# Altium PCB PCB1.PcbDoc
Units mil, origin at the board's own origin, x right, y up, seen from the top; angles counter-clockwise.
Board outline 3346.46 x 2204.72 mil, 2 copper layers (Top Layer, Bottom Layer); 25 components, 15 nets, 68 pads, 0 vias.
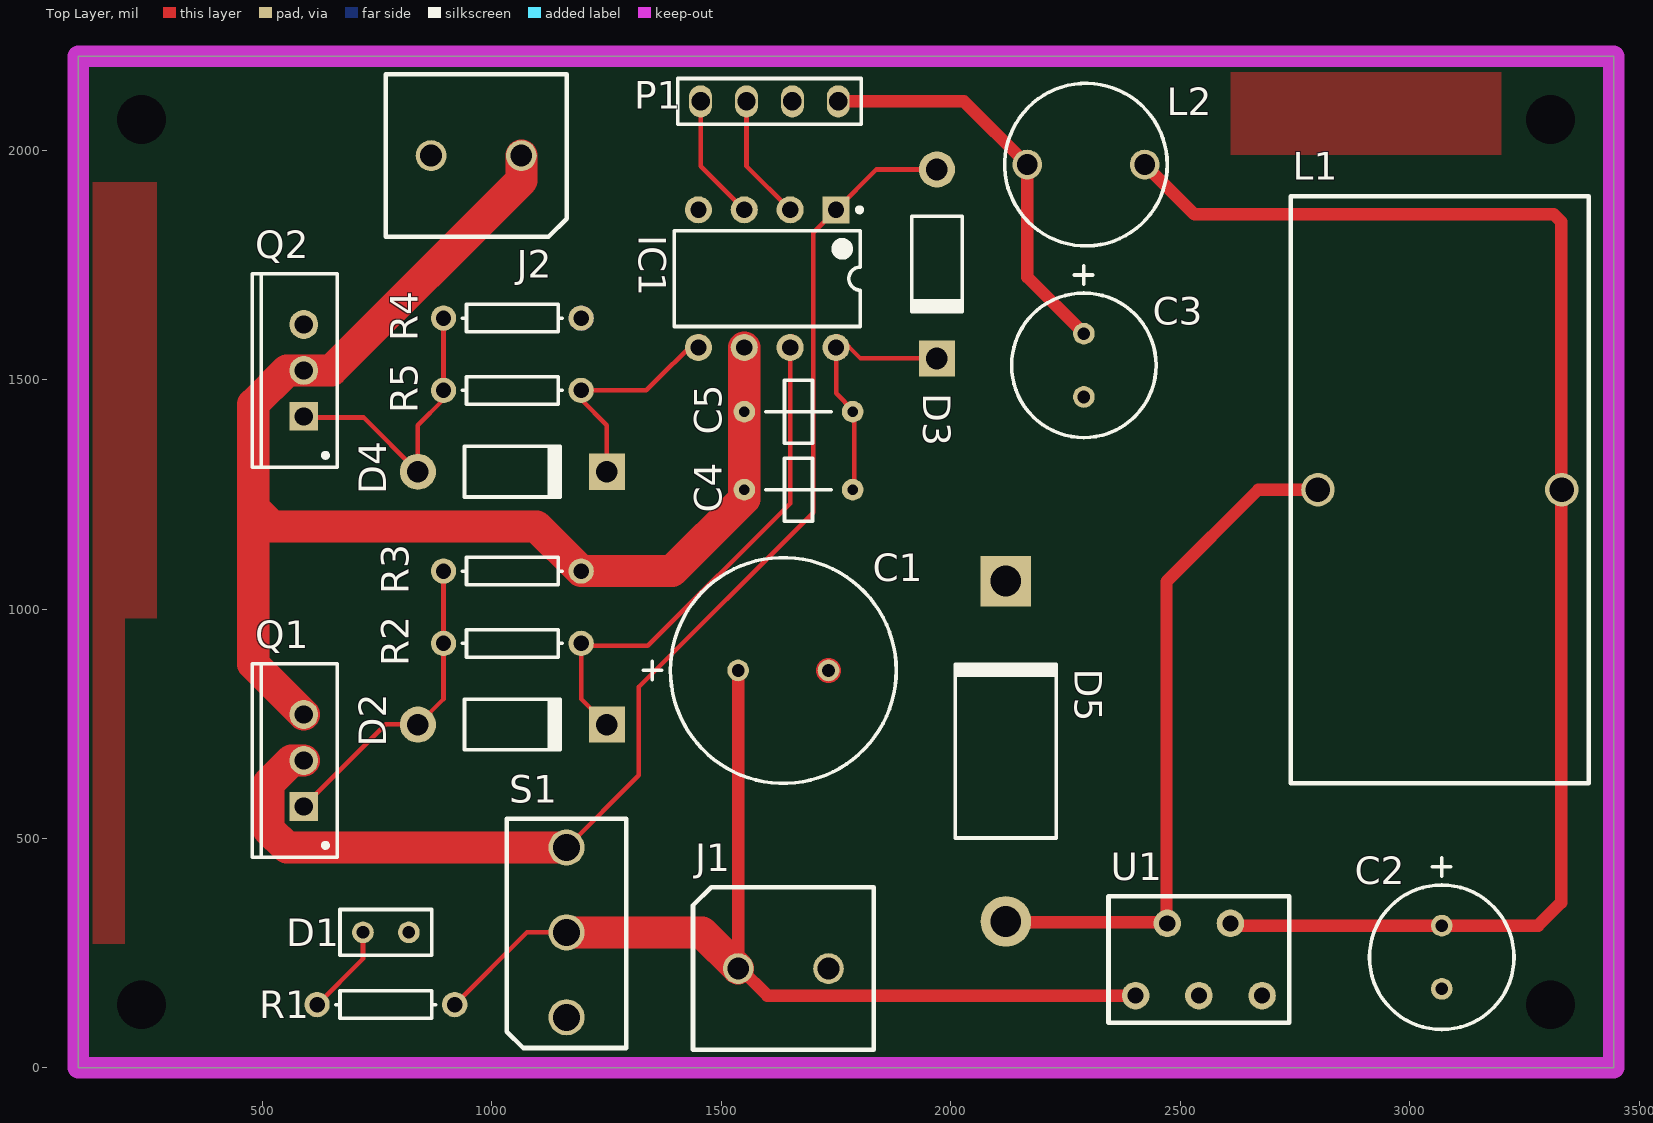
[diagram p0: Top Layer view]
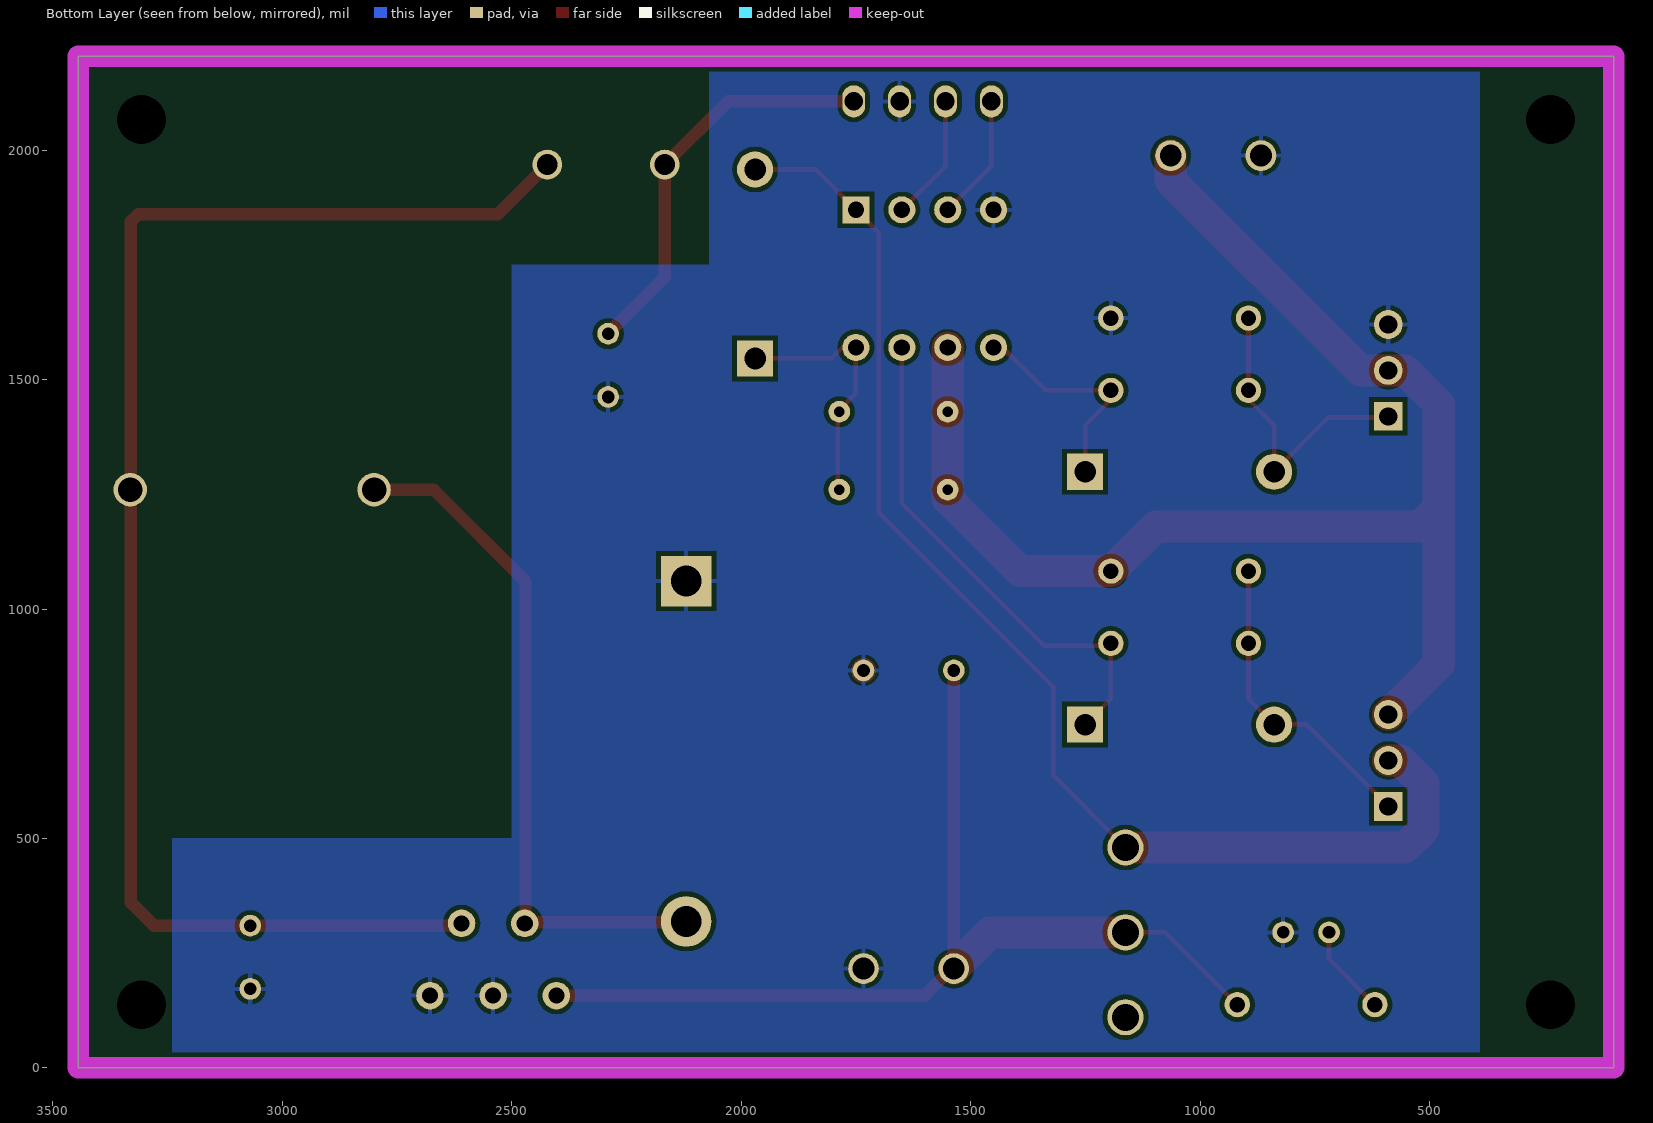
[diagram p1: Bottom Layer view, seen from below]

## Layer stack, top to bottom
Top Solder: solder mask 0.4, Solder Resist, Dk 3.5
Top Layer: signal copper 1.4
Dielectric 1: dielectric 12.6, FR-4, Dk 4.8
Bottom Layer: signal copper 1.4
Bottom Solder: solder mask 0.4, Solder Resist, Dk 3.5

## Board outline
98.43,0 3444.88,0 3444.88,2204.72 98.43,2204.72

## Design rules (kind name [scope] priority, off if disabled: settings)
Clearance [All] p1: gap=10 ignorepadtopadclearanceinfootprint=TRUE except(0: Arc-Hole Track-Hole SMDPad-Hole THPad-Hole Via-Hole Fill-Hole Poly-Hole Region-Hole Text-Hole)
PolygonConnect [All] p1: connectstyle=Relief reliefconductorwidth=10 reliefentries=4 polygonreliefangle="90 Angle" airgapwidth=10
RoutingVias [All] p1: holewidth=28 width=50 viastyle="Through Hole" minholewidth=28 minwidth=50 maxholewidth=28 maxwidth=50
SolderMaskExpansion [All] p1: expansion=4 istentingtop=FALSE
Width [All] p1: maxlimit=100 minlimit=10 preferedwidth=10
30 further rules are at their usual default settings.

## Components (designator, comment, footprint, x,y, rotation, side; value= is the part's Value field where it differs from the comment)
C1 "Cap Pol1" EEU-FM1V681 1733.54,866.14 r180 top value=680uF
C2 "Cap Pol1" EEU-FM1V221L 3070,172.2 r90 top value=220uF
C3 "Cap Pol1" EEU-FR1V181 2290,1462.2 r90 top value=180uF
C4 "Cap" "Axial Cap 0.5mm" 1550,1260 r0 top value=22uF
C5 "Cap" "Axial Cap 0.5mm" 1550,1430 r0 top value=100nF
D1 "LED" RAD-0.1 768.98,295.28 r0 top
D2 "1N4004" DO-41 1044.57,748.03 r0 top
D3 "1N4004" DO-41 1969.76,1751.97 r270 top
D4 "1N4004" DO-41 1044.57,1299.21 r0 top
D5 "1N5824" DO-201AD 2120,690 r90 top
IC1 "IR2301" DIP-8 1600,1720 r270 top
J1 "Screw Terminal" ST-2 1536.69,216.54 r0 top
J2 "Screw Terminal" ST-2 1064.25,1988.19 r180 top
L1 "Inductor" "Inductor 2307-V-RC" 2800,1260 r0 top value=33uH
L2 "Inductor" "Inductor Dia: 8.8mm" 2422.52,1968.5 r180 top value=3uH
P1 "4-Pin Header" HDR-4P 1754.8,2106.3 r180 top
Q1 "IRF520" TO-220AB 590,670 r90 top
Q2 "IRF520" TO-220AB 590,1520 r90 top
R1 "Resistor" AXIAL-0.3 768.98,137.8 r0 top
R2 "Res1" AXIAL-0.3 1044.57,925.2 r180 top value=10
R3 "Res1" AXIAL-0.3 1044.57,1082.68 r180 top value=1K
R4 "Res1" AXIAL-0.3 1044.57,1633.86 r180 top value=1K
R5 "Res1" AXIAL-0.3 1044.57,1476.38 r180 top value=10
S1 "Switch" "E101 Switch" 1292.6,43.31 r90 top
U1 "Step-down switching regulator" TO-220-5 2402.83,157.48 r0 top

## Footprints (in the part's own frame and the unit in brackets; to place one, negate y for a bottom-side part, rotate by r counter-clockwise, add the part's x,y. Pads: shape width x height; smd on the part's side, far side on the other; paste and mask are expansions set on the pad)
"Axial Cap 0.5mm" [mm]
  round 1.2 hole 0.6: 1(0,0) 2(6,0)
  silkscreen extent 1.2,-1.75 4.8,1.75
AXIAL-0.3 [mm] "Axial Device, Thru-Hole; 2 Leads; 0.3 in Pin Spacing"
  round 1.4 hole 0.85: 1(-3.81,0) 2(3.81,0)
  silkscreen extent -2.77,-0.76 2.77,0.76
DIP-8 [mm] "DIP; 8 Leads; Row Spacing 7.62 mm; Pitch 2.54 mm"
  rect 1.5x1.5 hole 0.9: 1(-3.81,3.81)
  round 1.5 hole 0.9: 2(-3.81,1.27) 3(-3.81,-1.27) 4(-3.81,-3.81) 5(3.81,-3.81) 6(3.81,-1.27) 7(3.81,1.27) 8(3.81,3.81)
  silkscreen extent -3.93,-5.15 2.65,5.24, body extent -3.6,-5.15 3.6,5.15, height 5.08
DO-41 [mm] "Diode, Axial; Body 5.2 x 2.7 mm (LxDia. max), Lead Dia. 0.86 mm (max)"
  round 2 hole 1.2: 1(-5.23,0)
  rect 2x2 hole 1.2: 2(5.23,0)
  silkscreen extent -2.65,-1.4 2.75,1.4
DO-201AD [mm] "Diode, Axial; Body 9.5 x 5.6 mm (LxDia. max), Lead Dia. 1.32 mm (max)"
  round 2.8 hole 1.7: 1(-9.42,0)
  rect 2.8x2.8 hole 1.7: 2(9.42,0)
  silkscreen extent -4.8,-2.8 4.9,2.8
"E101 Switch" [mm]
  round 2 hole 1.5: 1(1.7,3.3) 2(6.4,3.3) 3(11.1,3.3)
  silkscreen extent 0,0 12.7,6.6
EEU-FM1V221L [mm]
  round 1.2 hole 0.7: 1(3.5,0) 2(0,0)
  silkscreen extent -2.25,-4 7.26,4
EEU-FM1V681 [mm]
  round 1.2 hole 0.7: 1(5,0) 2(0,0)
  silkscreen extent -3.75,-6.25 10.25,6.25
EEU-FR1V181 [mm]
  round 1.2 hole 0.7: 1(3.5,0) 2(0,0)
  silkscreen extent -2.25,-4 7.26,4
HDR-4P [mil]
  oval 50x70 hole 40: 1(0,0) 2(100,0) 3(200,0) 4(300,0)
  silkscreen extent -50,-50 350,50
"Inductor 2307-V-RC" [mm]
  round 1.85 hole 1.35: 1(0,0) 2(13.5,0)
  silkscreen extent -1.5,-16.25 15,16.25
"Inductor Dia: 8.8mm" [mm]
  round 1.65 hole 1.15: 1(0,0) 2(6.5,0)
  silkscreen extent -1.25,-4.5 7.75,4.5
RAD-0.1 [mm] "Radial Cap, Thru-Hole; 2 Leads; 0.1 in Pin Spacing"
  round 1.2 hole 0.7: 1(-1.27,0) 2(1.27,0)
  silkscreen extent -2.54,-1.27 2.54,1.27
ST-2 [mm] "2 Port Screw Terminal"
  round 1.7 hole 1.2: 1(0,0) 2(5,0)
  silkscreen extent -2.5,-4.5 7.5,4.5
TO-220-5 [mm] "TO-220-5"
  round 1.524 hole 0.89: 1(0,0) 2(1.75,4) 3(3.5,0) 4(5.25,4) 5(7,0)
  silkscreen extent -1.5,-1.5 8.5,5.5
TO-220AB [mm] "TO, Thru-Hole, Vertical, Heatsink Mounted; 3 In-Line Leads; Pitch 2.54 mm"
  rect 1.6x1.6 hole 1: 1(-2.54,0)
  round 1.6 hole 1: 2(0,0) 3(2.54,0)
  silkscreen extent -5.35,-1.85 5.35,2.85, body extent -5.4,-1.9 5.4,2.9, height 19.3

## Part data
C1 C2 C3: "Polarized Capacitor (Radial)", LatestRevisionDate=17-Jul-2002, LatestRevisionNote="Re-released for DXP Platform.", PackageDescription="Polarized Capacitor (Radial); 2 Leads", PackageReference=RB7.6-15, Published=8-Jun-2000, Publisher="Altium Limited"
C4 C5: "Capacitor", LatestRevisionDate=17-Jul-2002, LatestRevisionNote="Re-released for DXP Platform.", PackageDescription="Radial Cap, Thru-Hole; 2 Leads; 0.3 in Pin Spacing", PackageReference=RAD-0.3, Published=8-Jun-2000, Publisher="Altium Limited"
D1: "Generic LED", Color=Red
D2 D3 D4: library part "Diode 1N4004", "1 Amp General Purpose Rectifier", Code_JEDEC=DO-204-AL, ComponentLink1Description="Manufacturer Link", ComponentLink1URL=http://www.fairchildsemi.com/, ComponentLink2Description=Datasheet, ComponentLink2URL=http://www.fairchildsemi.com/ds/1N%2F1N4001.pdf, DatasheetVersion=1998, LatestRevisionDate=17-Jul-2002, LatestRevisionNote="Re-released for DXP Platform.", PackageDescription="Diode, Axial; Body 5.2 x 2.7 mm (LxDia. max), Lead Dia. 0.86 mm (max)", PackageReference=DO-41, PackageVersion=Aug-1999, Published=8-Jun-2000, Publisher="Altium Limited"
D5: library part "Schottky Diode"
IC1: "High and Low Side Driver"
J1 J2: "2 Port Screw Terminal"
P1: library part HDR_1x4
Q1 Q2: library part NMOS-2, "N-Channel Power MOSFET", ComponentLink1Description="Manufacturer Link", ComponentLink1URL=http://www.irf.com/, DatasheetVersion=PD-9.814, LatestRevisionDate=17-Jul-2002, LatestRevisionNote="Re-released for DXP Platform.", Note="Pin 2 is electrically connected to pin 4.", PackageDescription="TO, Thru-Hole, Vertical, Heatsink Mounted; 3 In-Line Leads; Pitch 2.54 mm", PackageReference=TO-220AB, PackageVersion=Feb-1997, Published=8-Jun-2000, Publisher="Altium Limited"
R1: "Generic Resistor", Resistance=1K
R2 R3 R4 R5: "Resistor", LatestRevisionDate=17-Jul-2002, LatestRevisionNote="Re-released for DXP Platform.", PackageDescription="Axial Device, Thru-Hole; 2 Leads; 0.3 in Pin Spacing", PackageReference=AXIAL-0.3, Published=8-Jun-2000, Publisher="Altium Limited"
U1: library part LM2596
L1 L2: Code_IEC=1005, Code_JEITA=0402, LatestRevisionDate=29-May-2009, LatestRevisionNote="IPC-7351 Footprint Added.", PackageDescription="Chip Inductor", PackageReference=0402-A, Published=8-Jun-2000, Publisher="Altium Limited"

## Free pads (board coordinates)
  round 60 hole 106.3 unplated: 1(236.22,2066.93) 2(3307.09,2066.93) 3(236.22,137.8) 4(3307.09,137.8)

## Nets (pads, with @x,y where several pads share a name; then routed paths per layer and width w, separated by ;. In a path a pad name is that pad's centre, name@x,y a point inside that pad or via, vN(x,y) a via of type N, cw(c..) or ccw(c..) an arc to the next point about the centre after c; other vN are vias at no path point)
5V: C3.1 L2.2 P1.1 | length 888.5
  Top Layer w27: P1.1 2028.82,2106.3 L2.2 2166.61,1723.39 C3.1
GND: C1.2 C2.2 C3.2 D1.2 D5.2 IC1.4 J1.2 J2.2 P1.2 Q2.3 R4.1 U1.3 U1.5 | length 14
  Bottom Layer w10: J1.2@1723.98,226.1 J1.2
  Bottom Layer w55: IC1.4@1450,1869.64 IC1.4
HIN: IC1.2 P1.3 | length 275.7
  Top Layer w10: P1.3 1554.8,1965.2 IC1.2
LIN: IC1.3 P1.4 | length 275.7
  Top Layer w10: P1.4 1454.8,1965.2 IC1.3
NetC2_1: C2.1 L1.2 L2.1 U1.4 | length 3171.7
  Top Layer w27: L2.1 2531.02,1860 3314.18,1860 3330,1844.18 3330,1261.5 L1.2 3330,1258.5 3330,360 3280,310 C2.1 U1.4@2623.42,310
NetC4_2: C4.2 C5.2 D3.2 IC1.8 | length 565.6
  Top Layer w10: IC1.8 1750,1470 C5.2@1787.8,1432.2 ; IC1.8@1754.8,1594.49 1803.23,1546.06 D3.2 ; C4.2@1790,1252.83 C5.2@1790,1430
NetD1_1: D1.1 R1.1 | length 198.9
  Top Layer w10: R1.1 718.98,237.8 D1.1
NetD2_1: D2.1 Q1.1 R2.2 R3.2 | length 642.2
  Top Layer w10: Q1.1 769,749 D2.1@839.63,749 ; D2.1 D2.1@839.63,749 ; R2.2@894.57,905.51 894.57,803.94 D2.1@839.63,749 ; R2.2 R3.2@894.57,1062.99
NetD2_2: D2.2 IC1.7 R2.1 | length 1133.1
  Top Layer w10: R2.1@1194.57,905.51 1194.57,803.94 D2.2 ; R2.1 1199.76,920 1340,920 1650,1230 IC1.7 1650,1578.98 1654.8,1583.79 IC1.7@1654.8,1594.49
NetD3_1: D3.1 IC1.1 Q1.2 S1.3 | length 2752.1
  Top Layer w10: S1.3 1320.16,637.8 1320.16,830.16 1700,1210 1700,1820 IC1.1 1837.87,1957.87 D3.1
  Top Layer w70: Q1.2 563.37,670 513.5,620.14 513.5,519.86 553.05,480.31 S1.3
NetD4_1: D4.1 Q2.1 R4.2 R5.2 | length 636.8
  Top Layer w10: Q2.1 592.68,1417.32 720.55,1417.32 D4.1 838.66,1400.79 R5.2@894.57,1456.69 ; R5.2 R4.2
NetD4_2: D4.2 IC1.5 R5.1 | length 489.8
  Top Layer w10: R5.1@1194.57,1456.69 1250.47,1400.79 D4.2 ; R5.1 1336.69,1476.38 IC1.5@1454.8,1594.49
NetD5_1: D5.1 L1.1 U1.2 | length 1515.3
  Top Layer w27: D5.1@2120.87,320 D5.1 2122.09,317.05 2469.65,317.05 U1.2@2470,316.69 ; U1.2 U1.2@2470,316.69 ; L1.1 2670,1260 2470,1060 U1.2@2470,316.69
  Bottom Layer w10: D5.1@2127.24,318.11 D5.1@2130.39,314.96
VCC: C1.1 J1.1 R1.2 S1.2 U1.1 | length 2255.8
  Top Layer w10: R1.2 1076.46,295.28 S1.2
  Top Layer w27: J1.1 C1.1 ; J1.1@1541.25,216.54 1600.3,157.48 U1.1
  Top Layer w70: S1.2 1457.95,295.28 J1.1
  Bottom Layer w27: J1.1 J1.1@1541.25,216.54
VOUT: C4.1 C5.1 IC1.6 J2.1 Q1.3 Q2.2 R3.1 | length 3086.8
  Top Layer w55: Q1.3 Q1.3@590,772.16
  Top Layer w70: Q1.3 480,880 480,1221.01 ; J2.1 1064.25,1934.25 650,1520 553.68,1520 480,1446.32 480,1221.01 ; IC1.6 C5.1 C4.1 1550,1240 1392.68,1082.68 R3.1 1097.24,1180 521.01,1180 480,1221.01
pads on no net: S1.1

## Polygon pours and split planes (outlines as drawn)
no net on Top Overlay "NONET_L-01_P-001" (solid): 250,1930
no net on Top Layer "NONET_L01_P004" (solid, pour order 4): 130,1930 130,270 200,270 200,980 270,980 270,1930
no net on Top Layer "NONET_L01_P003" (solid, pour order 3): 2610,2170 2610,1990 3200,1990 3200,2170
GND on Bottom Layer "GND_L02_P000" (solid, pour order 0): 390,2180 390,30 3240,30 3240,500 2500,500 2500,1750 2070,1750 2070,2180

## Keep-outs
Keep-Out Layer:
  the board outline again, w47.24

## Silkscreen, mask and mechanical layers (free items; w line width, h text height)
Top Solder:
  drawing of 2114 lines, arcs and shapes, not listed
  text "Ryan Tran, Derick Xie, Emma Yuan, Bryan Troung, Tejas Choudhary" at 151.25,1920 h60 r270
  text "UCSD Grand PrIEEE Team 2" at 210.85,1920 h80 r270